# EAGLE board I2C_sensors (EAGLE 8.5.2)
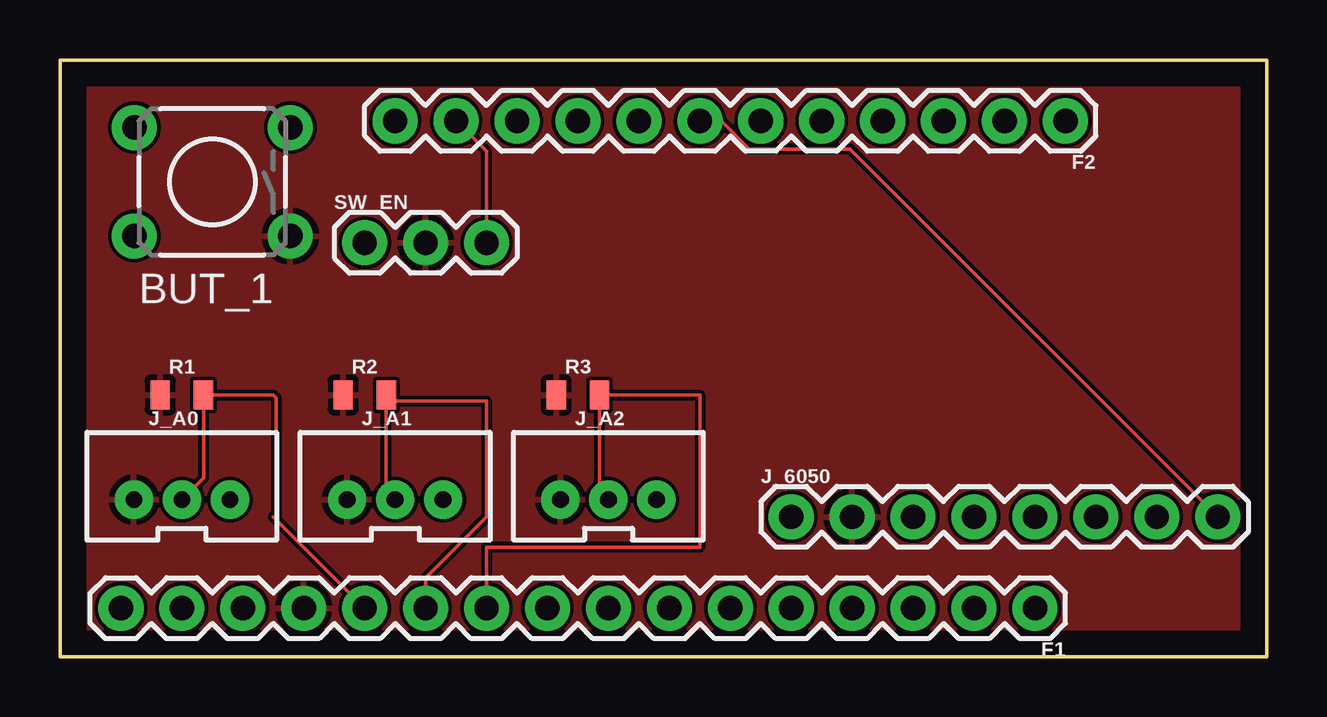
[diagram p0: board, top side]
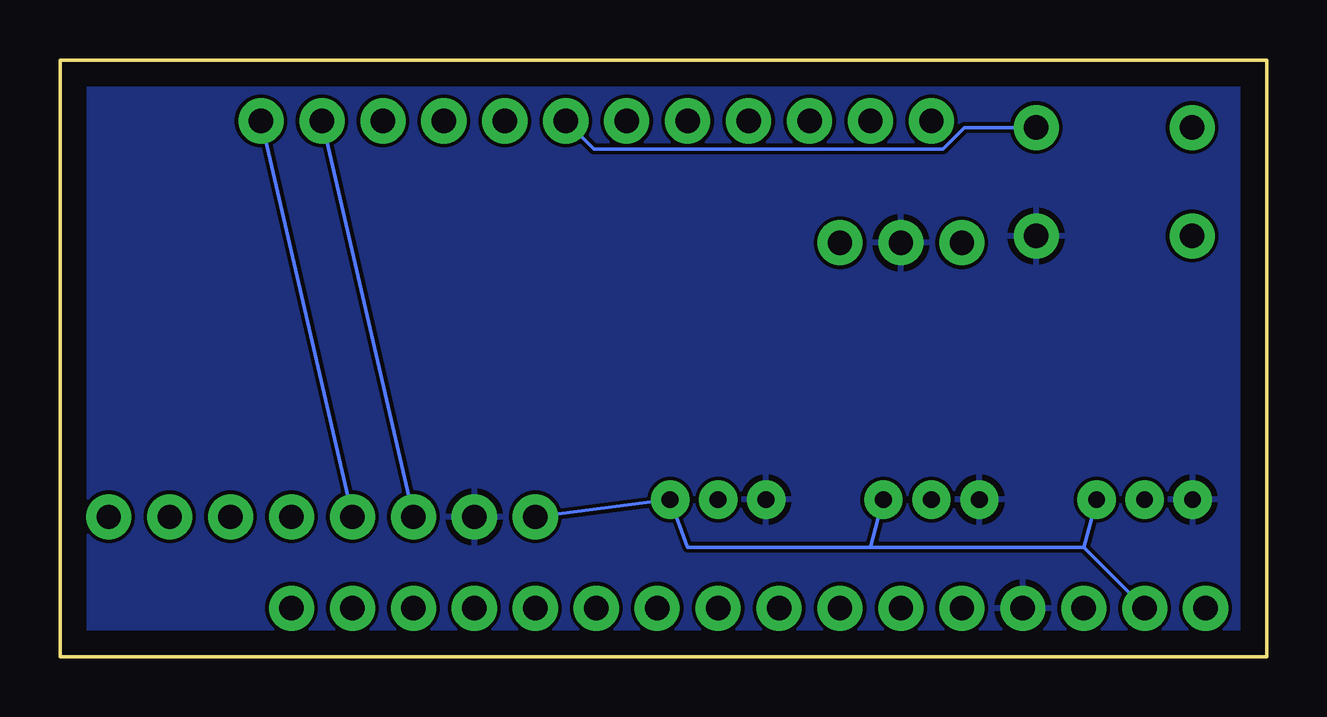
[diagram p1: board, bottom side, seen from below]

Size 50.29 x 24.89 mm. Coordinates in mm from the lower left corner, seen from the top.
Outline: 0,0 0,24.89 50.29,24.89 50.29,0 0,0
Copper layers (1*16): Top 0.035mm / dielectric 1.5mm / Bottom 0.035mm
Design rules "default": minimum track width 6mil, minimum drill 0.35mm, track to track 6mil, track to pad 6mil, pad to pad 6mil, via to via 6mil, smd to smd 6mil, copper to edge 40mil, drill to drill 6mil, minimum pad ring 10mil, minimum via ring 8mil, stop-mask expansion 4mil, vias tented up to drill 0mil, thermal gap 10mil

## Footprints (pad centres in the part's own frame; a part is rotated, then mirrored left to right if it is on the bottom)
TACTILE-PTH = drill 1.016 pad 1.88: 1 -3.251,2.261; 2 3.251,2.261; 3 -3.251,-2.261; 4 3.251,-2.261
1X16 = drill 1.016 pad 1.88: 1 0,0; 2 2.54,0; 3 5.08,0; 4 7.62,0; 5 10.16,0; 6 12.7,0; 7 15.24,0; 8 17.78,0; 9 20.32,0; 10 22.86,0; 11 25.4,0; 12 27.94,0; 13 30.48,0; 14 33.02,0; 15 35.56,0; 16 38.1,0
1X12 = drill 1.016 pad 1.88: 1 0,0; 2 2.54,0; 3 5.08,0; 4 7.62,0; 5 10.16,0; 6 12.7,0; 7 15.24,0; 8 17.78,0; 9 20.32,0; 10 22.86,0; 11 25.4,0; 12 27.94,0
1X08 = drill 1.016 pad 1.88: 1 0,0; 2 2.54,0; 3 5.08,0; 4 7.62,0; 5 10.16,0; 6 12.7,0; 7 15.24,0; 8 17.78,0
JST-3-PTH-VERT = drill 0.7 pad 1.6: 1 -2,-0.55; 2 0,-0.55; 3 2,-0.55
0805 = smd 0.8 x 1.2: 1 -0.9,0; 2 0.9,0
1X03 = drill 1.016 pad 1.88: 1 0,0; 2 2.54,0; 3 5.08,0

## Placement (x,y rotation side)
BUT_1  [TACTILE-PTH]  6.35,19.81 180 top
F1  [1X16]  40.64,2.03 180 top
F2  [1X12]  41.91,22.35 180 top
FRAME1  FRAME-LETTER  [CREATIVE_COMMONS]  -88.9,3.3 0 top  (outside the outline)
J_6050  [1X08]  30.48,5.84 0 top
J_A0  [JST-3-PTH-VERT]  5.08,7.11 0 top
J_A1  [JST-3-PTH-VERT]  13.97,7.11 0 top
J_A2  [JST-3-PTH-VERT]  22.86,7.11 0 top
R1  30K 63mW  [0805]  5.08,10.92 0 top
R2  30K 63mW  [0805]  12.7,10.92 0 top
R3  30K 63mW  [0805]  21.59,10.92 0 top
SW_EN  [1X03]  12.7,17.27 0 top

## Library data of the parts
BUT_1 = SparkFun-Retired
F1 F2 = SparkFun-Connectors
FRAME1 = SparkFun-Aesthetics
J_6050 = SparkFun-Connectors; PROD_ID: CONN-08438
J_A0 J_A1 J_A2 = SparkFun-Connectors; PROD_ID: CONN-13230
R1-R3 = SparkFun-Resistors
SW_EN = SparkFun-Connectors; PROD_ID: XXX-00000

## Nets
A0: F1.12 J_A0.2 R1.2
A1: F1.11 J_A1.2 R2.2
A2: F1.10 J_A2.2 R3.2
A3: F1.9
A4: F1.8
A5: F1.7
AD0: J_6050.7
AREF: F1.14
BAT: F2.12
CHNL_SCAN: BUT_1.3 F2.6
D5: F2.3
D6: F2.4
D9: F2.5
D12: F2.8
D13: F2.9
EN: F2.11 SW_EN.3
GND: BUT_1.1 F1.13 J_6050.2 J_A0.1 J_A1.1 J_A2.1 R1.1 R2.1 R3.1 SW_EN.2
MISO: F1.4
MOSI: F1.5
MPU_INT: F2.7 J_6050.8
N$3: SW_EN.1
RST: F1.16
RX: F1.3
SCI: F2.2 J_6050.3
SCK: F1.6
SDA: F2.1 J_6050.4
SPEC: F1.1
TX: F1.2
USB: F2.10
VCC: F1.15 J_6050.1 J_A0.3 J_A1.3 J_A2.3
XCL: J_6050.6
XDA: J_6050.5

## Tracks (layer width: path | path; a pad name or v marks a point on that pad's centre or on a via)
A0
  Top 0.152: J_A0.2 5.98,7.46 R1.2 8.89,10.92 9.02,10.79 9.02,5.71 | 8.89,5.84 9.02,5.71 | 9.02,5.71 F1.12
A1
  Top 0.152: J_A1.2 13.6,6.93 R2.2 13.85,10.67 17.78,10.67 17.78,5.84 15.24,3.3 F1.11
A2
  Top 0.152: J_A2.2 22.49,6.93 R3.2 26.67,10.92 26.67,4.57 17.78,4.57 F1.10
CHNL_SCAN
  Bottom 0.152: BUT_1.3 12.6,22.07 13.49,21.18 28.04,21.18 F2.6
EN
  Top 0.152: SW_EN.3 17.78,21.08 F2.11
GND
  pour Top (isolate 0): 0,24.64 0,0.76 50.04,0.76 50.04,24.64
  pour Bottom (isolate 0): 0,24.38 0,0.76 50.29,0.76 50.29,24.38
MPU_INT
  Top 0.152: J_6050.8 32.92,21.18 28.73,21.18 27.56,22.35 F2.7
SCI
  Bottom 0.152: F2.2 J_6050.3
SDA
  Bottom 0.152: F2.1 J_6050.4
VCC
  Bottom 0.152: J_6050.1 J_A2.3 24.13,4.57 16.51,4.57 | 16.51,4.57 16.19,5.75 J_A1.3 | J_A0.3 7.62,4.57 | 7.62,4.57 16.51,4.57 | 7.62,4.57 F1.15